# Altium PCB GaN_Half_Bridge4.PcbDoc
Units mil, origin at the board's own origin, x right, y up, seen from the top; angles counter-clockwise.
Board outline 3937.01 x 1624.02 mil, 2 copper layers (Top Layer, Bottom Layer); 71 components, 31 nets, 196 pads, 488 vias.
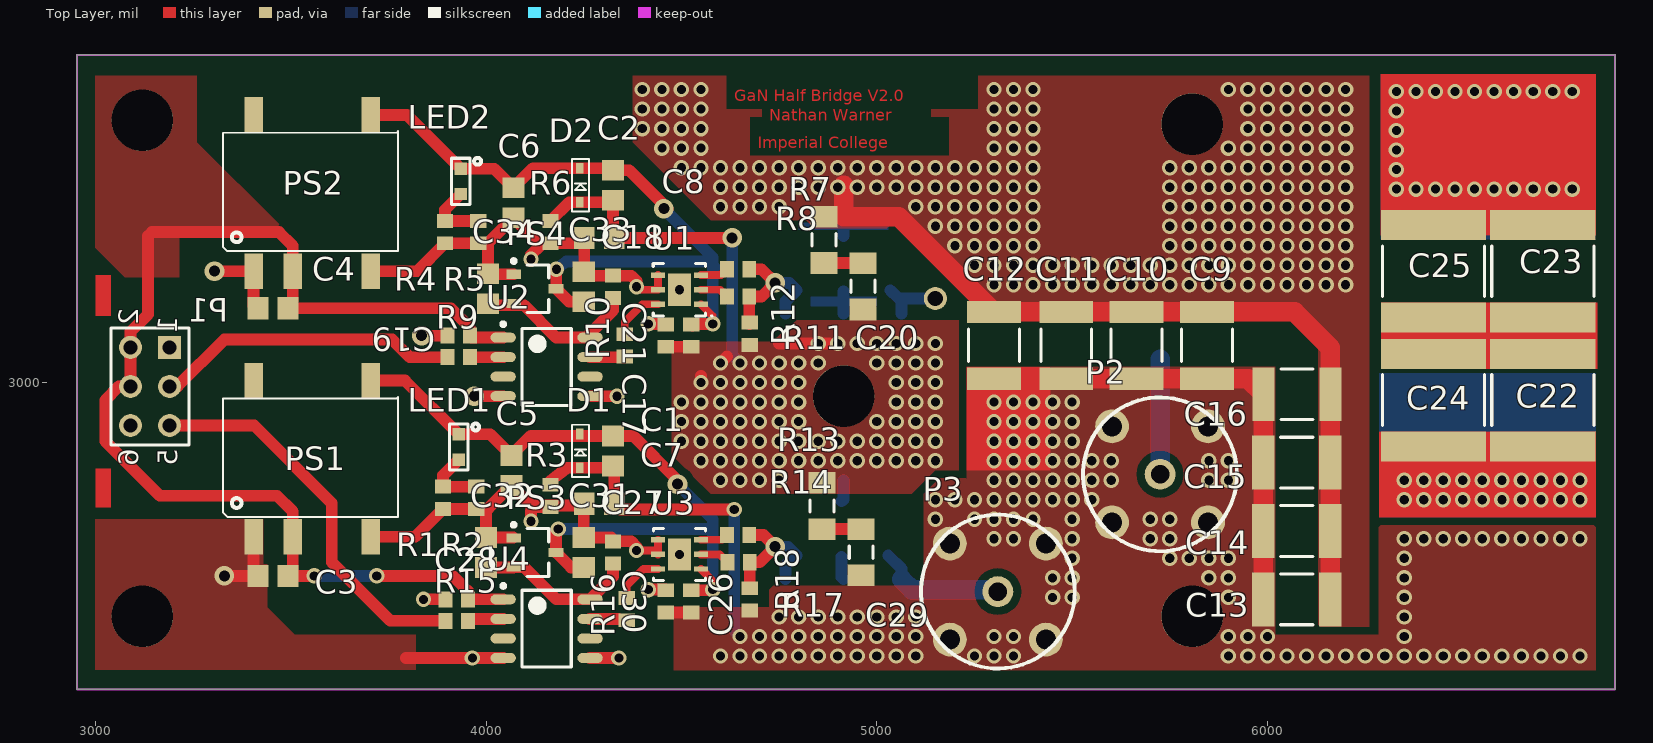
[diagram p0: Top Layer view]
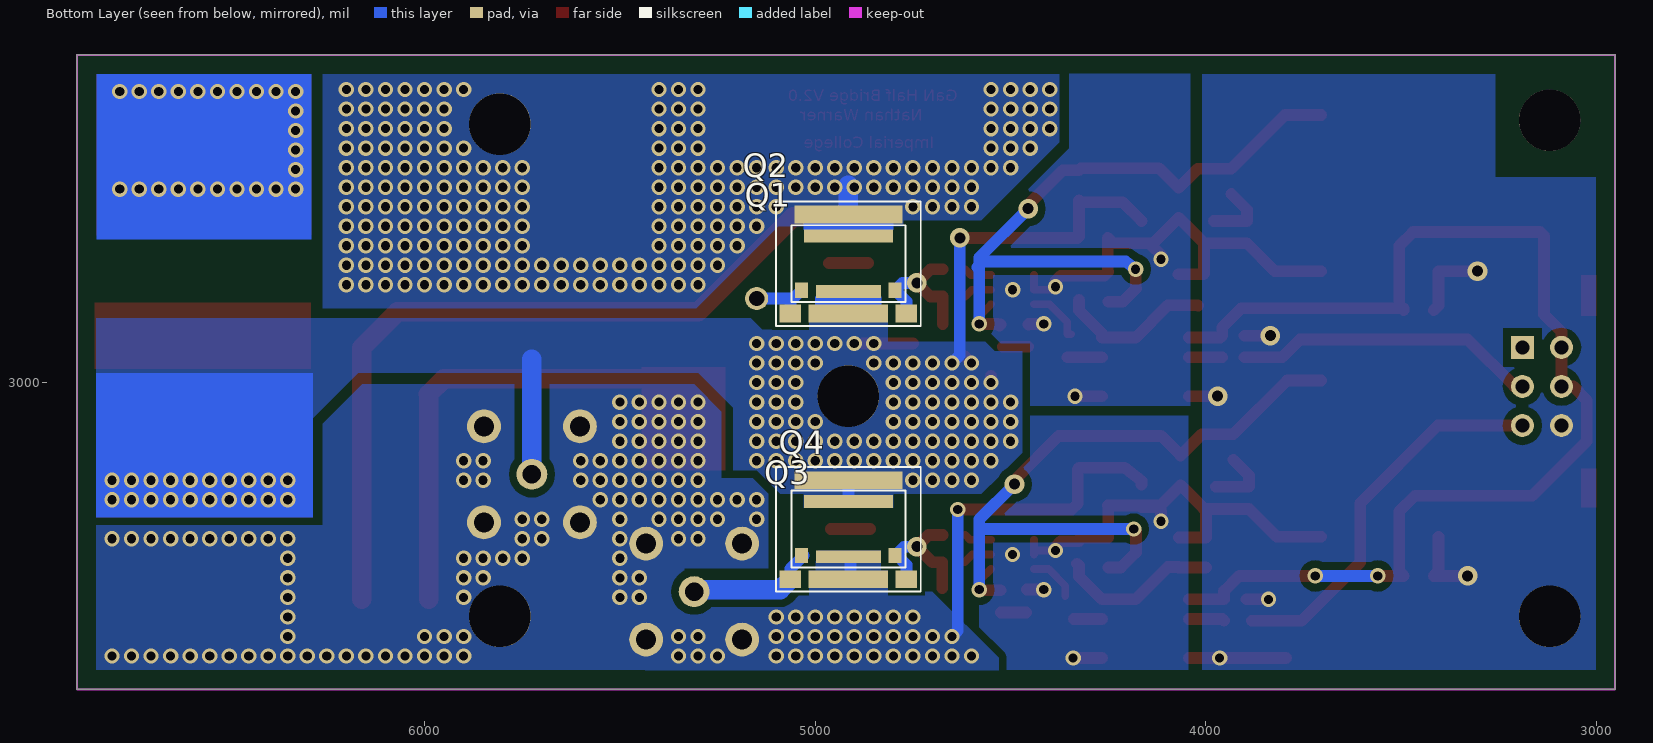
[diagram p1: Bottom Layer view, seen from below]

## Layer stack, top to bottom
Top Solder: solder mask 0.4, Solder Resist, Dk 3.5
Top Layer: signal copper 1.4
Dielectric 1: dielectric 12.6, FR-4, Dk 4.8
Bottom Layer: signal copper 1.4
Bottom Solder: solder mask 0.4, Solder Resist, Dk 3.5

## Board outline
2952.76,2214.57 6889.76,2214.57 6889.76,3838.58 2952.76,3838.58

## Design rules (kind name [scope] priority, off if disabled: settings)
Clearance Clearance_3 [InComponent('U1','U3')] p1: gap=0 ignorepadtopadclearanceinfootprint=FALSE
Clearance Clearance_2 [InPolygon] p2: gap=20 ignorepadtopadclearanceinfootprint=FALSE
Clearance Clearance_1 [InComponent('P2','P3')] p3: gap=20 ignorepadtopadclearanceinfootprint=FALSE
Clearance [All] p4: gap=10 ignorepadtopadclearanceinfootprint=FALSE
ComponentClearance "GaN Package" [InComponent('Q1','Q2','Q3','Q4','P2','P3')] p1: gap=0 collisioncheckmode=3 verticalgap=0 showdistances=FALSE
ComponentClearance [All] p2: gap=10 collisioncheckmode=3 verticalgap=10 showdistances=FALSE
PolygonConnect [All] p1: connectstyle=Direct reliefconductorwidth=10 reliefentries=4 polygonreliefangle="90 Angle" airgapwidth=10
RoutingVias [All] p1: holewidth=28 width=50 viastyle="Through Hole" minholewidth=28 minwidth=50 maxholewidth=28 maxwidth=50
SolderMaskExpansion [All] p1: expansion=4
Width [All] p1: maxlimit=1000 minlimit=10 preferedwidth=30
29 further rules are at their usual default settings.

## Components (designator, comment, footprint, x,y, rotation, side; value= is the part's Value field where it differs from the comment)
C1 "Cap Semi" "0805 IPC Low Density" 4325,2825 r90 top value=4.7uF
C2 "Cap Semi" "0805 IPC Low Density" 4325,3505 r90 top value=4.7uF
C3 "Cap Semi" "0805 IPC Low Density" 3455,2505 r0 top value=4.7uF
C4 "Cap Semi" "0805 IPC Low Density" 3455,3190 r0 top value=4.7uF
C5 "Cap Semi" "0805 IPC Low Density" 4065,2775 r90 top value=4.7uF
C6 "Cap Semi" "0805 IPC Low Density" 4070,3460 r90 top value=4.7uF
C7 "Cap Semi" "0805 IPC Low Density" 4290,2690 r0 top value=4.7uF
C8 "Cap Semi" "0805 IPC Low Density" 4290,3370 r0 top value=4.7uF
C9 "Cap Semi" "1812 IPC Low Density" 5845,3095 r90 top value=100pF
C10 "Cap Semi" "1812 IPC Low Density" 5665,3095 r90 top value=100pF
C11 "Cap Semi" "1812 IPC Low Density" 5485,3095 r90 top value=100pF
C12 "Cap Semi" "1812 IPC Low Density" 5300,3095 r90 top value=100pF
C13 "Cap Semi" "1812 IPC Low Density" 6075,2445 r0 top value=100pF
C14 "Cap Semi" "1812 IPC Low Density" 6075,2620 r0 top value=100pF
C15 "Cap Semi" "1812 IPC Low Density" 6075,2795 r0 top value=100pF
C16 "Cap Semi" "1812 IPC Low Density" 6075.63,2970 r0 top value=100pF
C17 "Cap Semi" "0603 IPC Low Density" 4525,3120 r90 top value=1uF
C18 "Cap Semi" "0603 IPC Low Density" 4325,3245 r90 top value=1uF
C19 "Cap Semi" "0603 IPC Low Density" 3930,3120 r180 top value=1uF
C20 "Cap Semi" "1206 IPC Low Density" 4965,3245.94 r90 top value=100pF
C21 "Cap Semi" "0603 IPC Low Density" 4460,3120 r90 top value=1uF
C22 "CAP 2525" "CAP 2525" 6705,2955 r90 top
C23 "CAP 2525" "CAP 2525" 6705,3285 r90 top
C24 "CAP 2525" "CAP 2525" 6425,2955 r90 top
C25 "CAP 2525" "CAP 2525" 6425,3285 r90 top
C26 "Cap Semi" "0603 IPC Low Density" 4525,2440 r90 top value=1uF
C27 "Cap Semi" "0603 IPC Low Density" 4325,2565 r90 top value=1uF
C28 "Cap Semi" "0603 IPC Low Density" 3925,2445 r180 top value=1uF
C29 "Cap Semi" "1206 IPC Low Density" 4960,2565.94 r90 top value=100pF
C30 "Cap Semi" "0603 IPC Low Density" 4460,2440 r90 top value=1uF
C31 "Cap Semi" "0805 IPC Low Density" 4250,2565 r270 top value=4.7uF
C32 "Cap Semi" "0805 IPC Low Density" 4000,2565 r270 top value=4.7uF
C33 "Cap Semi" "0805 IPC Low Density" 4250,3245 r270 top value=4.7uF
C34 "Cap Semi" "0805 IPC Low Density" 4005,3240 r270 top value=4.7uF
D1 "BZT52C6V2S-7-F" SOD-323 4240,2825 r90 top
D2 "BZT52C6V2S-7-F" SOD-323 4240,3505 r90 top
LED1 "LED" "LED 0603" 3930,2835 r270 top
LED2 "LED" "LED 0603" 3935,3515 r270 top
P1 "Header 3X2" HDR2X3 3190,3090 r270 top
P2 "BNC" BNC 5847.83,2887.83 r0 top
P3 "BNC" BNC 5432.83,2587.83 r0 top
PS1 "PES1-S5-S9-M" PES1-S5-S9-M 3405,2605 r0 top
PS2 "PES1-S5-S9-M" PES1-S5-S9-M 3405,3285 r0 top
PS3 "5V_REG" SOT23-3 4125,2565 r0 top
PS4 "5V_REG" SOT23-3 4125,3240 r0 top
Q1 "GS66508T" GS66508T 4915,3304.13 r180 bottom
Q2 "GS66516T" GS66516T 4915,3176.46 r180 bottom
Q3 "GS66508T" GS66508T 4915,2625 r180 bottom
Q4 "GS66516T" GS66516T 4915,2496.46 r180 bottom
R1 "Res3" "RESISTOR 0603" 3890,2705 r90 top value=3.3K
R2 "Res3" "RESISTOR 0603" 3975,2705 r90 top value=3.3K
R3 "Res3" "RESISTOR 0603" 4165,2710 r90 top value=1K
R4 "Res3" "RESISTOR 0603" 3895,3385 r90 top value=3.3K
R5 "Res3" "RESISTOR 0603" 3980,3385 r90 top value=3.3K
R6 "Res3" "RESISTOR 0603" 4165,3385 r90 top value=1K
R7 "Res3" "RESISTOR 1206" 4865,3365 r90 top value=1K
R8 "Res3" "RESISTOR 0603" 4645,3220 r0 top value=10R
R9 "Res3" "RESISTOR 0603" 3930,3065 r0 top value=49R9
R10 "Res3" "RESISTOR 0603" 4355,3095 r90 top value=49R9
R11 "Res3" "RESISTOR 0603" 4645,3290 r0 top value=2R
R12 "Res3" "RESISTOR 0603" 4675,3125 r90 top value=3.3K
R13 "Res3" "RESISTOR 1206" 4860,2684.06 r90 top value=1K
R14 "Res3" "RESISTOR 0603" 4646.46,2540 r0 top value=10R
R15 "Res3" "RESISTOR 0603" 3925,2390 r0 top value=49R9
R16 "Res3" "RESISTOR 0603" 4360,2420 r90 top value=49R9
R17 "Res3" "RESISTOR 0603" 4645,2610 r0 top value=2R
R18 "Res3" "RESISTOR 0603" 4675,2445 r90 top value=3.3K
U1 "LM5114" WSON 4494.92,3237.6 r180 top
U2 "ISO7720" SOIC8_N 4155,3040 r0 top
U3 "LM5114" WSON 4495,2560 r180 top
U4 "ISO7720" SOIC8_N 4155,2370 r0 top

## Footprints (in the part's own frame and the unit in brackets; to place one, negate y for a bottom-side part, rotate by r counter-clockwise, add the part's x,y. Pads: shape width x height; smd on the part's side, far side on the other; paste and mask are expansions set on the pad)
"0603 IPC Low Density" [mm] "Chip Resistor, 0603, Body 1.60x0.80mm, IPC Low Density"
  rect 0.9x1.05 smd: 1(-0.725,0) 2(0.725,0)
  body extent -0.87,-0.48 0.87,0.48, height 0.6
"0805 IPC Low Density" [mm] "Chip Resistor, 0805, Body 2.00x1.25mm, IPC Low Density"
  rect 1.35x1.45 smd: 1(-0.975,0) 2(0.975,0)
  body extent -1.1,-0.67 1.1,0.67, height 0.7
"1206 IPC Low Density" [mm] "Chip Resistor, 1206, Body 3.20x1.60mm, IPC Low Density"
  rect 1.4x1.75 smd: 1(-1.5,0) 2(1.5,0)
  silkscreen extent -0.4,-0.77 0.4,0.77, body extent -1.63,-0.82 1.63,0.82, height 0.7
"1812 IPC Low Density" [mm] "Chip Resistor, 1812, Body 4.50x3.20mm, IPC Low Density"
  rect 1.45x3.5 smd: 1(-2.175,0) 2(2.175,0)
  silkscreen extent -1.05,-1.65 1.05,1.65, body extent -2.35,-1.7 2.35,1.7, height 0.7
BNC [mm]
  round 2.2 hole 1.3: GND(-6.24,-6.24) GND(-6.24,0) GND(0,-6.24) GND(0,0)
  round 2 hole 1.2: SIG(-3.12,-3.12)
  silkscreen extent -8.12,-8.12 1.88,1.88
"CAP 2525" [mm] "Chip Capacitor, 2-Leads, Body 6.35x6.35mm, IPC Low Density"
  rect 1.95x6.85 smd: 1(-3,0) 2(3,0)
  silkscreen extent -1.65,-3.32 1.65,3.32, body extent -3.43,-3.36 3.43,3.36, height 2.59
GS66508T [mm]
  rect 5.81x0.84 smd: D(0,1.8)
  rect 0.84x0.99 smd: G(-3.04,-1.72) G(3.04,-1.72)
  rect 4.24x0.84 smd paste+0: S(0,-1.8)
  silkscreen extent -3.7,-2.5 3.7,2.5
GS66516T [mm]
  rect 7.04x1.15 smd: D(0,6.44)
  rect 1.4x1.15 smd: G(-3.77,0) G(3.77,0)
  rect 5.17x1.15 smd: S(0,0)
  silkscreen extent -4.7,-0.8 4.7,7.3
HDR2X3 [mm] "Connector; Header; 3x2 Position"
  rect 1.5x1.5 hole 0.9: 1(0,0)
  round 1.5 hole 0.9: 2(0,-2.54) 3(2.54,0) 4(2.54,-2.54) 5(5.08,0) 6(5.08,-2.54)
  silkscreen extent -1.27,-3.81 6.35,1.27
"LED 0603" [mm]
  rect 0.8x0.8 smd: A(-0.825,0) K(0.825,0)
  silkscreen extent -1.52,-0.6 1.5,1.32
PES1-S5-S9-M [mm] "Isolated DC/DC Converters 1W 4.5-5.5Vin 9Vout 111mA UnReg Iso SMT"
  rect 1.2x2.3 smd: 1(0,0) 2(2.54,0) 4(7.62,0) 5(7.62,10.16) 8(0,10.16)
  silkscreen extent -2,1.3 9.4,9.1
"RESISTOR 0603" [mm] "Chip Resistor, 0603, Body 1.60x0.80mm, IPC Low Density"
  rect 0.9x1.05 smd: 1(-0.725,0) 2(0.725,0)
  body extent -0.87,-0.48 0.87,0.48, height 0.6
"RESISTOR 1206" [mm] "Chip Resistor, 1206, Body 3.20x1.60mm, IPC Low Density"
  rect 1.4x1.75 smd: 1(-1.5,0) 2(1.5,0)
  silkscreen extent -0.4,-0.77 0.4,0.77, body extent -1.63,-0.82 1.63,0.82, height 0.7
SOD-323 [mm]
  rect 0.7x0.5 smd: A(-1.1,0) K(1.1,0)
  silkscreen extent -1.7,-0.6 1.7,0.5
SOIC8_N [mm] "SOIC, 8-Leads, Body 4.90x3.90mm, Pitch 1.27mm, IPC Low Density"
  oval 1.65x0.65 smd: 1(-2.825,1.905) 2(-2.825,0.635) 3(-2.825,-0.635) 4(-2.825,-1.905) 5(2.825,-1.905) 6(2.825,-0.635) 7(2.825,0.635) 8(2.825,1.905)
  silkscreen extent -2.95,-2.5 1.6,2.9, body extent -2,-2.5 2,2.5, height 1.75
SOT23-3 [mm] "SOT23, 3-Leads, Body 2.90x2.75mm, Pitch 0.95mm, IPC Medium Density"
  rect 0.95x0.6 smd: 1(-1.375,0.95) 2(-1.375,-0.95) 3(1.375,0)
  silkscreen extent -1.5,-1.55 0.9,1.92, body extent -0.9,-1.55 0.9,1.55, height 1.4
WSON [mm] "SON, 6-Leads, Body 3.00x3.00mm, Pitch 0.95mm, Thermal Pad 2.10x1.49mm, IPC Medium Density"
  rect 0.9x0.35 smd: 1(-1.395,0.95) 2(-1.395,0) 3(-1.395,-0.95) 4(1.395,-0.95) 5(1.395,0) 6(1.395,0.95)
  rect 1.49x2.1 smd: 7(0,0)
  silkscreen extent -2.15,-1.7 1.7,1.75, body extent -1.55,-1.55 1.55,1.55, height 0.8

## Part data
C1 C2 C3 C4 C5 C6 C7 C8 C9 C10 C11 C12 C13 C14 C15 C16 C17 C18 C19 C20 C21 C26 C27 C28 C29 C30 C31 C32 C33 C34: "Capacitor (Semiconductor SIM Model)", LatestRevisionDate=29-May-2009, LatestRevisionNote="IPC-7351 Footprint Added.", PackageDescription="Chip Capacitor", PackageReference=C1206, Published=8-Jun-2000, Publisher="Altium Limited"
D1 D2: "Zener Diodes 6.2V 200mW"
LED1 LED2: "SML-D12U1WT86"
P1: "Header, 3-Pin, Dual row", LatestRevisionDate=17-Jul-2002, LatestRevisionNote="Re-released for DXP Platform.", Publisher="Altium Limited"
P2 P3: "Straight 50O Through Hole BNC Connector", PackageDocument="Rev. A, 16-Jun-1997", ComponentLink1Description="Manufacturer Link", ComponentLink1URL=http://www.amphenolrf.com/, DatasheetDocument=30-May-2003, DrillSize="Corresponds to nominal value.", LatestRevisionDate=15-Jul-2004, LatestRevisionNote="Component Replaced.", PackageReference=908-21103, PCB_Layout="Complies with manufacturer's recommendation.", Published=15-Jul-2004, Publisher="Altium Limited"
Q1 Q3: library part GS66508P, "650 V E-HEMT - Top Side Cooled", Mfr 1="GaN Systems", Mfr 1 PN=GS66508P
Q2 Q4: "Top-side cooled 650 V E-mode GaN transistor"
R1 R2 R3 R4 R5 R6 R7 R8 R9 R10 R11 R12 R13 R14 R15 R16 R17 R18: "Resistor", LatestRevisionDate=29-May-2009, LatestRevisionNote="IPC-7351 Footprint Added.", PackageDescription="Chip Resistor", PackageReference=J1-0603, Published=8-Jun-2000, Publisher="Altium Limited"

## Free pads (board coordinates)
  round 157.48 hole 157.48: 11(4915,2965)
  round 157.48 hole 157.48 unplated: 12(3120.08,3671.26) 13(3120.08,2401.57) 14(5807.09,3661.42) 15(5807.09,2401.57)
  round 59.06 hole 39.37: 16(5150,3215)

## Via types
v1: diameter 39.37, hole 23.62, Top Layer to Bottom Layer, 479 vias
v2: diameter 50, hole 28, Top Layer to Bottom Layer, 9 vias

## Nets (pads, with @x,y where several pads share a name; then routed paths per layer and width w, separated by ;. In a path a pad name is that pad's centre, name@x,y a point inside that pad or via, vN(x,y) a via of type N, cw(c..) or ccw(c..) an arc to the next point about the centre after c; other vN are vias at no path point)
0V: C3.1 C4.1 C19.2 C28.2 P1.6 pad.13 PS1.1 PS2.1 U2.4 U4.4 | length 841.7
  Top Layer w30: v2(3305,3285) PS2.1 3405,3196.61 C4.1@3416.61,3185 ; v2(3330,2505) C3.1 3405,2516.61 PS1.1 ; 3795,2295 v1(3965,2295) U4.4 ; v2(3835,3120) C19.2 ; v1(3840,2445) C28.2 ; v2(3970,2965) U2.4
+5V_ISOH: C18.1 C34.2 PS4.2 U2.8 | length 401.6
  Top Layer w30: C34.2@4020,3196.61 4020.98,3197.6 4097.4,3197.6 4180,3115 U2.8 4266.22,3126.22 4325,3185 C18.1@4325,3211.46
+5V_ISOL: C27.1 C32.2 PS3.2 U4.8 | length 418.7
  Top Layer w30: C32.2 4069.88,2526.61 PS3.2 4097.4,2527.6 4180,2445 U4.8 4325,2503.78 4325,2531.46 C27.1@4330,2536.46
GNDH: C2.1 C8.2 C17.1 C20.1 C21.1 C22.1 C24.1 D2.A P2.SIG pad.11 Q1.S Q2.S Q3.D Q4.D R6.2 R12.1 R13.2 | length 1550.8
  Top Layer w30: R6.2 4213.15,3461.69 D2.A 4320.08,3461.69 C2.1 4325,3373.39 C8.2 v2(4630,3370) ; C21.1@4455,3091.46 C21.1 C17.1@4520,3091.46 ; v1(4550,3000) v1@4550,3016.46 ; v1(4600,3050) 4616.46,3066.46 ; 4750,3100 4800,3100 v1(4850,3100) 4878.11,3100
  Bottom Layer w30: v2(4630,3370) 4630,3070 v1(4650,3050) ; Q3.D@4910,2695.87 4915,2700.87 Q4.D ; Q2.S Q1.S
  Bottom Layer w50: P2.SIG 5725,3060
  other v1: 6350,2700 6400,2700 6450,2700 6500,2700 6550,2700 6600,2700 6650,2700 6700,2700 6750,2700 6800,2700 4600,2750 4650,2750 4700,2750 4750,2750 6350,2750 6400,2750 6450,2750 6500,2750 6550,2750 6600,2750 6650,2750 6700,2750 6750,2750 6800,2750 4550,2800 4600,2800 4650,2800 4700,2800 4750,2800 4800,2800 4850,2800 4900,2800 4950,2800 5000,2800 5050,2800 5100,2800 5150,2800 4500,2850 4550,2850 4600,2850 4650,2850 4700,2850 4750,2850 4800,2850 4850,2850 4900,2850 4950,2850 5000,2850 5050,2850 5100,2850 5150,2850 4500,2900 4550,2900 4600,2900 4650,2900 4700,2900 4750,2900 4800,2900 5000,2900 5050,2900 5100,2900 5150,2900 4500,2950 4550,2950 4600,2950 4650,2950 4700,2950 4750,2950 4800,2950 5050,2950 5100,2950 5150,2950 4600,3000 4650,3000 4700,3000 4750,3000 4800,3000 5050,3000 5100,3000 5150,3000 4700,3050 4750,3050 4800,3050 4850,3050 5000,3050 5050,3050 5100,3050 5150,3050 4900,3100 4950,3100 5000,3100 5050,3100 5100,3100 5150,3100
GNDL: C1.1 C7.2 C9.1 C10.1 C11.1 C12.1 C13.1 C14.1 C15.1 C16.1 C26.1 C29.1 C30.1 D1.A P2.GND P3.GND pad.15 Q3.S Q4.S R3.2 R18.1 | length 2274.6
  Top Layer w30: R3.2 4165,2748.54 4208.07,2781.61 4325,2781.61 4328.39,2778.23 C7.2 4343.39,2675 v1(4635,2675) ; C30.1 C26.1
  Top Layer w50: C12.1 C11.1 C10.1 C9.1 5950.63,3009.37 C16.1 5989.37,2969.37 C15.1 C14.1 C13.1
  Bottom Layer w30: v1(4635,2675) 4635,2365 v1(4650,2350) ; Q3.S@4910,2554.13 4910,2501.46 Q4.S
  other v1: 4600,2300 4650,2300 4700,2300 4750,2300 4800,2300 4850,2300 4900,2300 4950,2300 5000,2300 5050,2300 5100,2300 5250,2300 5300,2300 5350,2300 5900,2300 5950,2300 6000,2300 6050,2300 6100,2300 6150,2300 6200,2300 6250,2300 6300,2300 6350,2300 6400,2300 6450,2300 6500,2300 6550,2300 6600,2300 6650,2300 6700,2300 6750,2300 6800,2300 4700,2350 4750,2350 4800,2350 4850,2350 4900,2350 4950,2350 5000,2350 5050,2350 5100,2350 5300,2350 5350,2350 5900,2350 5950,2350 6000,2350 6350,2350 4750,2400 4800,2400 4850,2400 4900,2400 4950,2400 5000,2400 5050,2400 5100,2400 6350,2400 5450,2450 5500,2450 5900,2450 6350,2450 5450,2500 5500,2500 5850,2500 5900,2500 6350,2500 5500,2550 5750,2550 5800,2550 5850,2550 5900,2550 6350,2550 5300,2600 5350,2600 5500,2600 5700,2600 5750,2600 6350,2600 6400,2600 6450,2600 6500,2600 6550,2600 6600,2600 6650,2600 6700,2600 6750,2600 6800,2600 5150,2650 5250,2650 5300,2650 5350,2650 5400,2650 5500,2650 5700,2650 5750,2650 5150,2700 5200,2700 5250,2700 5300,2700 5350,2700 5400,2700 5450,2700 5500,2700 5550,2700 5300,2750 5350,2750 5400,2750 5450,2750 5500,2750 5550,2750 5600,2750 5850,2750 5900,2750 5300,2800 5350,2800 5400,2800 5450,2800 5500,2800 5550,2800 5600,2800 5850,2800 5900,2800 5300,2850 5350,2850 5400,2850 5450,2850 5500,2850 5300,2900 5350,2900 5400,2900 5450,2900 5500,2900 5300,2950 5350,2950 5400,2950 5450,2950 5500,2950
NetC20_2: C20.2 R7.1 | length 100.4
  Top Layer w30: R7.1 4964.06,3305.94 C20.2
NetC22_2: C22.2 C23.1 C24.2 C25.1
NetC29_2: C29.2 R13.1 | length 100
  Top Layer w30: R13.1 C29.2
NetLED1_2: LED1.K R1.2 R2.2 | length 170.5
  Top Layer w30: LED1.K 3890,2762.52 R1.2 R2.2
NetLED2_2: LED2.K R4.2 R5.2 | length 170.5
  Top Layer w30: LED2.K 3895,3442.52 R4.2 R5.2
NetP3_SIG: P3.SIG Q3.G Q4.G R14.2 R17.2 R18.2 | length 693.8
  Top Layer w30: R17.2 4710,2610 v2(4740,2580) 4700,2540 R14.2 R18.2
  Bottom Layer w30: v2(4740,2580) 4772.6,2580 Q3.G@4795.31,2557.28 ; Q4.G@4766.57,2496.46 4766.57,2533.54 Q3.G@4790.31,2557.28 ; Q3.G@5029.68,2557.28 5063.43,2523.54 Q4.G@5063.43,2496.46
  Bottom Layer w50: Q4.G@5063.43,2496.46 5089.88,2470 5295,2470 P3.SIG@5305,2460
NetQ1_G: pad.16 Q1.G Q2.G R8.2 R11.2 R12.2 | length 532.5
  Top Layer w30: R12.2@4673.54,3150 R8.2 4705,3220 v2(4740,3255) 4705,3290 R11.2
  Bottom Layer w30: v2(4740,3255) 4776.73,3255 4795.31,3236.42 4766.57,3207.68 Q2.G@4766.57,3176.46 ; Q1.G@5034.68,3236.42 5056.1,3215 ; Q2.G@5063.43,3176.46 5063.43,3207.68 5056.1,3215 ; pad.16 5056.1,3215
NetR8_1: R8.1 U1.2 | length 73.9
  Top Layer w20: U1.2 4598.86,3237.6 R8.1
NetR9_2: R9.2 U2.2 | length 85.2
  Top Layer w30: R9.2 U2.2
NetR10_1: R10.1 U2.7 | length 88.8
  Top Layer w30: U2.7 R10.1@4355,3065
NetR10_2: R10.2 U1.6 | length 145.2
  Top Layer w20: R10.2@4345,3123.54 R10.2 4355,3155 4400.2,3200.2 U1.6
NetR11_1: R11.1 U1.3 | length 72.8
  Top Layer w20: U1.3 4601.46,3275 R11.1
NetR14_1: R14.1 U3.2 | length 76.3
  Top Layer w20: U3.2 4597.91,2560 R14.1
NetR15_2: R15.2 U4.2 | length 92.3
  Top Layer w30: R15.2 3958.54,2395 U4.2
NetR16_1: R16.1 U4.7 | length 72.3
  Top Layer w30: U4.7 4338.54,2395
NetR16_2: R16.2 U3.6 | length 124.2
  Top Layer w20: R16.2@4360,2453.54 4360,2480 4402.6,2522.6 U3.6
NetR17_1: R17.1 U3.3 | length 71.8
  Top Layer w20: U3.3 4603.86,2597.4 R17.1
PWMH_IN: P1.3 R9.1 | length 779.8
  Top Layer w30: P1.3 3210,2990 3330,3110 3760,3110 3805,3065 R9.1
PWML_IN: P1.5 R15.1 | length 988.8
  Top Layer w30: P1.5 3406.57,2890 3605,2691.57 3605,2540 3755,2390 R15.1@3882.91,2390
VCC_+5V: C3.2 C4.2 C19.1 C28.1 P1.2 P1.4 pad.12 PS1.2 PS2.2 U2.1 U4.1 | length 3052.8
  Top Layer w30: C4.2@3493.39,3185 C4.2@3498.39,3190 ; C4.2 C4.2@3498.39,3190 ; v1(3560,2505) C3.2 3505,2516.61 PS1.2 3505,2670 3465,2710 3165,2710 3025,2850 3025,2955 3060,2990 P1.4 P1.2 3090,3130 3135,3175 3135,3375 3145,3385 3470,3385 3505,3350 PS2.2 3505,3196.61 C4.2@3498.39,3190 ; v1(3720,2505) 3915,2505 3953.54,2466.46 C28.1 U4.1 ; U2.1 3963.54,3115 C19.1 3958.54,3141.46 3910,3190 C4.2@3498.39,3190
  Bottom Layer w30: v1(3560,2505) v1(3720,2505)
VDDH_+6V: C2.2 C6.2 C17.2 C33.2 D2.K LED2.A PS2.5 PS4.3 U1.1 | length 1923.8
  Top Layer w20: U1.1 4580,3170.04 v1(4580,3150)
  Top Layer w30: PS2.5 3797.48,3685 LED2.A 4020.91,3547.48 C6.2 4119.92,3548.31 D2.K 4320.08,3548.31 C2.2 4366.61,3543.39 4465,3445 v2(4455,3445) ; PS4.3 4212.52,3206.61 C33.2 ; PS4.3@4180,3245 v1(4180,3290) ; C17.2 4528.54,3145 4533.54,3150 v1(4580,3150)
  Bottom Layer w30: v1(4180,3290) 4205,3310 4580,3310 ; v2(4455,3445) 4580,3320 4580,3310 ; v1(4580,3150) 4580,3290 4585,3295 4575,3305 4580,3310
VDDL_+6V: C1.2 C5.2 C26.2 C31.2 D1.K LED1.A PS1.5 PS3.3 U3.1 | length 1910.1
  Top Layer w20: v1@4179.13,2619.13 v1(4185,2625) ; U3.1 4578.54,2493.98 v1@4578.54,2468.54
  Top Layer w30: PS1.5 3792.48,3005 LED1.A 4010.91,2867.48 C5.2 4114.92,2863.31 C1.2@4320.08,2863.31 ; v1@4179.13,2619.13 PS3.3 4217.52,2526.61 C31.2 ; C1.2 4376.61,2863.39 4490,2750 v2(4490,2740) ; C26.2 v1@4578.54,2468.54
  Bottom Layer w20: 4575,2625 4580,2620
  Bottom Layer w30: v1(4185,2625) 4575,2625 ; v2(4490,2740) 4580,2650 4580,2620 v1(4580,2470)
VIN: C9.2 C10.2 C11.2 C12.2 C13.2 C14.2 C15.2 C16.2 pad.14 Q1.D Q2.D R7.2 | length 2240.1
  Top Layer w50: v1@4915,3505 4915,3424.06 5056.57,3424.06 C12.2 C11.2 C10.2 C9.2 6069.37,3180.63 6161.26,3088.74 C16.2 6160.63,2969.37 C15.2 C14.2 C13.2
  Bottom Layer w30: Q1.D Q2.D
  Bottom Layer w50: Q2.D v1@4915,3505
  other v1: 5300,3250 5350,3250 5400,3250 5450,3250 5500,3250 5550,3250 5600,3250 5650,3250 5700,3250 5750,3250 5800,3250 5850,3250 5900,3250 5950,3250 6000,3250 6050,3250 6100,3250 6150,3250 6200,3250 5250,3300 5300,3300 5350,3300 5400,3300 5450,3300 5500,3300 5550,3300 5600,3300 5650,3300 5700,3300 5750,3300 5800,3300 5850,3300 5900,3300 5950,3300 6000,3300 6050,3300 6100,3300 6150,3300 6200,3300 5200,3350 5250,3350 5300,3350 5350,3350 5400,3350 5750,3350 5800,3350 5850,3350 5900,3350 5950,3350 6000,3350 6050,3350 6100,3350 6150,3350 6200,3350 5150,3400 5200,3400 5250,3400 5300,3400 5350,3400 5400,3400 5750,3400 5800,3400 5850,3400 5900,3400 5950,3400 6000,3400 6050,3400 6100,3400 6150,3400 6200,3400 4600,3450 4650,3450 4700,3450 4750,3450 5100,3450 5150,3450 5200,3450 5250,3450 5300,3450 5350,3450 5400,3450 5750,3450 5800,3450 5850,3450 5900,3450 5950,3450 6000,3450 6050,3450 6100,3450 6150,3450 6200,3450 4600,3500 4650,3500 4700,3500 4750,3500 4800,3500 4850,3500 4900,3500 4950,3500 5000,3500 5050,3500 5100,3500 5150,3500 5200,3500 5250,3500 5300,3500 5350,3500 5400,3500 5750,3500 5800,3500 5850,3500 5900,3500 5950,3500 6000,3500 6050,3500 6100,3500 6150,3500 6200,3500 4500,3550 4550,3550 4600,3550 4650,3550 4700,3550 4750,3550 4800,3550 4850,3550 4900,3550 4950,3550 5000,3550 5050,3550 5100,3550 5150,3550 5200,3550 5250,3550 5300,3550 5350,3550 5400,3550 5750,3550 5800,3550 5850,3550 5900,3550 5950,3550 6000,3550 6050,3550 6100,3550 6150,3550 6200,3550 4450,3600 4500,3600 4550,3600 5300,3600 5350,3600 5400,3600 5900,3600 5950,3600 6000,3600 6050,3600 6100,3600 6150,3600 6200,3600 4400,3650 4450,3650 4500,3650 4550,3650 5300,3650 5350,3650 5400,3650 5950,3650 6000,3650 6050,3650 6100,3650 6150,3650 6200,3650 4400,3700 4450,3700 4500,3700 4550,3700 5300,3700 5350,3700 5400,3700 5950,3700 6000,3700 6050,3700 6100,3700 6150,3700 6200,3700 4400,3750 4450,3750 4500,3750 4550,3750 5300,3750 5350,3750 5400,3750 5900,3750 5950,3750 6000,3750 6050,3750 6100,3750 6150,3750 6200,3750
VOUT: C23.2 C25.2
  other v1: 6330,3495 6380,3495 6430,3495 6480,3495 6530,3495 6580,3495 6630,3495 6680,3495 6730,3495 6780,3495 6330,3545 6330,3595 6330,3645 6330,3695 6330,3745 6380,3745 6430,3745 6480,3745 6530,3745 6580,3745 6630,3745 6680,3745 6730,3745 6780,3745
VSSH: C6.1 C8.1 C18.2 C21.2 C33.1 C34.1 PS2.4 PS4.1 R4.1 R5.1 R6.1 U1.4 U1.5 U1.7 U2.5 | length 1285
  Top Layer w20: v1(4385,3245) 4392.4,3237.6 U1.5 U1.4
  Top Layer w30: PS2.4 3823.54,3285 R4.1 R5.1 4004.84,3356.46 ; PS4.1 4005.98,3277.4 C34.1 4005,3356.3 4004.84,3356.46 ; v1(4115,3315.81) 4115,3326.61 4140,3351.61 4135.16,3356.46 ; U2.5 v1(4335,2965) ; v1(4385,3245) 4385,3260 4371.46,3273.54 C18.2 4259.84,3273.54 C33.1 4251.61,3285 C8.1 4238.07,3356.46 R6.1 4135.16,3356.46 ; v1(4415,3150) 4453.54,3150 C21.2@4455,3148.54 ; 4004.84,3356.46 C6.1 4135.16,3356.46
  other v1: 4494.92,3237.6
VSSL: C5.1 C7.1 C27.2 C30.2 C31.1 C32.1 PS1.4 PS3.1 R1.1 R2.1 R3.1 U3.4 U3.5 U3.7 U4.5 | length 1291.9
  Top Layer w20: v1@4385,2580 v1(4385,2570) 4430.08,2570 ; U3.5 U3.4 ; C30.2@4458.54,2470 C30.2
  Top Layer w30: PS1.4 3818.54,2605 R1.1 R2.1 4004.84,2676.46 ; PS3.1@4069.88,2603.39 C32.1 4000,2671.61 4004.84,2676.46 ; v1(4115,2645) 4115,2671.46 4125,2681.46 R3.1 ; U4.5 v1(4340,2295) ; C27.2 C27.2@4330,2593.54 ; v1@4385,2580 4371.46,2593.54 C27.2@4330,2593.54 ; v1(4415,2470) C30.2@4458.54,2470 ; 4004.84,2676.46 C5.1 4116.61,2685 4251.61,2685 4250,2683.39 C31.1 4320.16,2603.39 C27.2@4330,2593.54
  other v1: 4495,2560
pads on no net: P1.1 PS1.8 PS2.8 U2.3 U2.6 U4.3 U4.6

## Polygon pours and split planes (outlines as drawn)
VCC_+5V on Top Layer "Top Layer-No Net" (solid, pour order 50): 3260,3615 3475,3400 3260,3400 3260,3380 3270,3370 3215,3370 3215,3270 3075,3270 3000,3345 3000,3355 3000,3570 3000,3785 3215,3785 3260,3785
GNDL on Top Layer "GNDL" (solid, pour order 16): 5230,2753.36 5228.36,2755 5160,2755 5120,2715 5120,2480 4735,2480 4725,2470 4725,2425 4480,2425 4480,2263.78 5413.39,2263.78 6840.55,2263.78 6840.55,2635 6285,2635 6285,2355 6020,2355 6020,3040 5230,3040
GNDH on Top Layer "GNDH_L01_P018" (solid, pour order 18): 4795,3160 5210,3160 5210,2775 5150,2775 5090,2715 4575,2715 4475,2815 4475,3105 4730.83,3105
VIN on Top Layer "VIN_L01_P020" (solid, pour order 20): 4840,3395 4820,3415 4575,3415 4375,3615 4375,3785 6260,3785 6260,2375 6135,2375 6130,2380 6130,3090 6035,3185 5265,3185 5040,3410 5025,3395
0V on Top Layer "Top Layer-No Net" (solid, pour order 52): 3820,2355 3510,2355 3440,2425 3440,2535 3430,2535 3430,2650 3000,2650 3000,2265 3820,2265
VSSL on Bottom Layer "Top Layer-No Net" (solid, pour order 58): 4045,2915 4450,2915 4450,2800 4580,2670 4580,2265 4045,2265
VIN on Bottom Layer "VIN_L02_P032" (solid, pour order 32): 4375,3789.37 4375,3615 4575,3415 4775,3415 4775,3400 5095,3400 5305,3190 6260,3190 6260,3789.37
GNDH on Bottom Layer "GNDH_L02_P028" (solid, pour order 28): 5210,2775 5150,2775 5090,2715 5030,2715 5030,2680 4800,2680 4800,2715 4575,2715 4470,2820 4470,3080 4540,3080 4565,3105 4815,3105 4815,3200 5015,3200 5015,3135 5210,3135
GNDH on Bottom Layer "GNDH_L02_P030" (solid, pour order 30): 5135,3135 5165,3165 6840.55,3165 6840.55,3027.5 6840,3026.95 6840,2890 6305,2890 6170,3025 5300,3025 5135,2860
GNDL on Bottom Layer "GNDL_L02_P040" (solid, pour order 40): 5240,2755 5232.11,2755 5160,2755 5120,2715 5120,2525 5335,2525 5335,2460 5015,2460 5015,2520 5000,2520 5000,2570 4830,2570 4830,2520 4815,2520 4815,2460 4810,2465 4700,2465 4530,2295 4530,2263.78 5435,2263.78 5436.22,2265 6840,2265 6840,2635 6260,2635 6260,2895 6160,2995 5310,2995 5240,2925
VSSH on Bottom Layer "Top Layer-No Net" (solid, pour order 54): 4350,3790 4350,3600 4550,3400 4550,3125 4525,3100 4450,3100 4450,2940 4040,2940 4040,3790
0V on Bottom Layer "0V_L02_P036" (solid, pour order 36): 3001.97,3525 3260,3525 3260,3789.37 4010,3789.37 4010,2265 3001.97,2265

## Keep-outs
Keep-Out Layer:
  the board outline again, w5

## Other copper
Top Layer:
  rectangle net VOUT: 6289.37,3375.98 6840.55,3789.37
  rectangle net GNDH: 6285,2655 6840.55,2875
  rectangle net NetC22_2: 6290,3035 6845,3205
  rectangle net GNDL: 5230,2775 5445,3040
  rectangle: 3000,3170 3040,3275
  rectangle: 3000,2680 3040,2780
  text "GaN Half Bridge V2.0" at 4635,3720 h30
  text "Nathan Warner" at 4725,3670 h30
  text "Imperial College" at 4695,3600 h30
Bottom Layer:
  rectangle net VOUT: 6289.37,3366.14 6839.92,3789.37
  rectangle net GNDH: 6285,2655 6840.55,3025
  rectangle net GNDH: 4830,3195 5000,3220
  rectangle net VIN: 4800,3390 5030,3410

## Text inside footprints (layer, text, board x,y; h text height)
P1: Top Overlay "1" at 3210,3170 h50 r90; Top Overlay "2" at 3110,3190 h50 r90; Top Overlay "5" at 3210,2830 h50 r90; Top Overlay "6" at 3110,2830 h50 r90